# Altium PCB PCB1_GHEPNOI.PcbDoc
Units mil, origin at the board's own origin, x right, y up, seen from the top; angles counter-clockwise.
Board outline 3800.03 x 3840.03 mil, 2 copper layers (Top Layer, Bottom Layer); 62 components, 72 nets, 278 pads, 26 vias.
Unrouted connection lines stored in the file: 3.
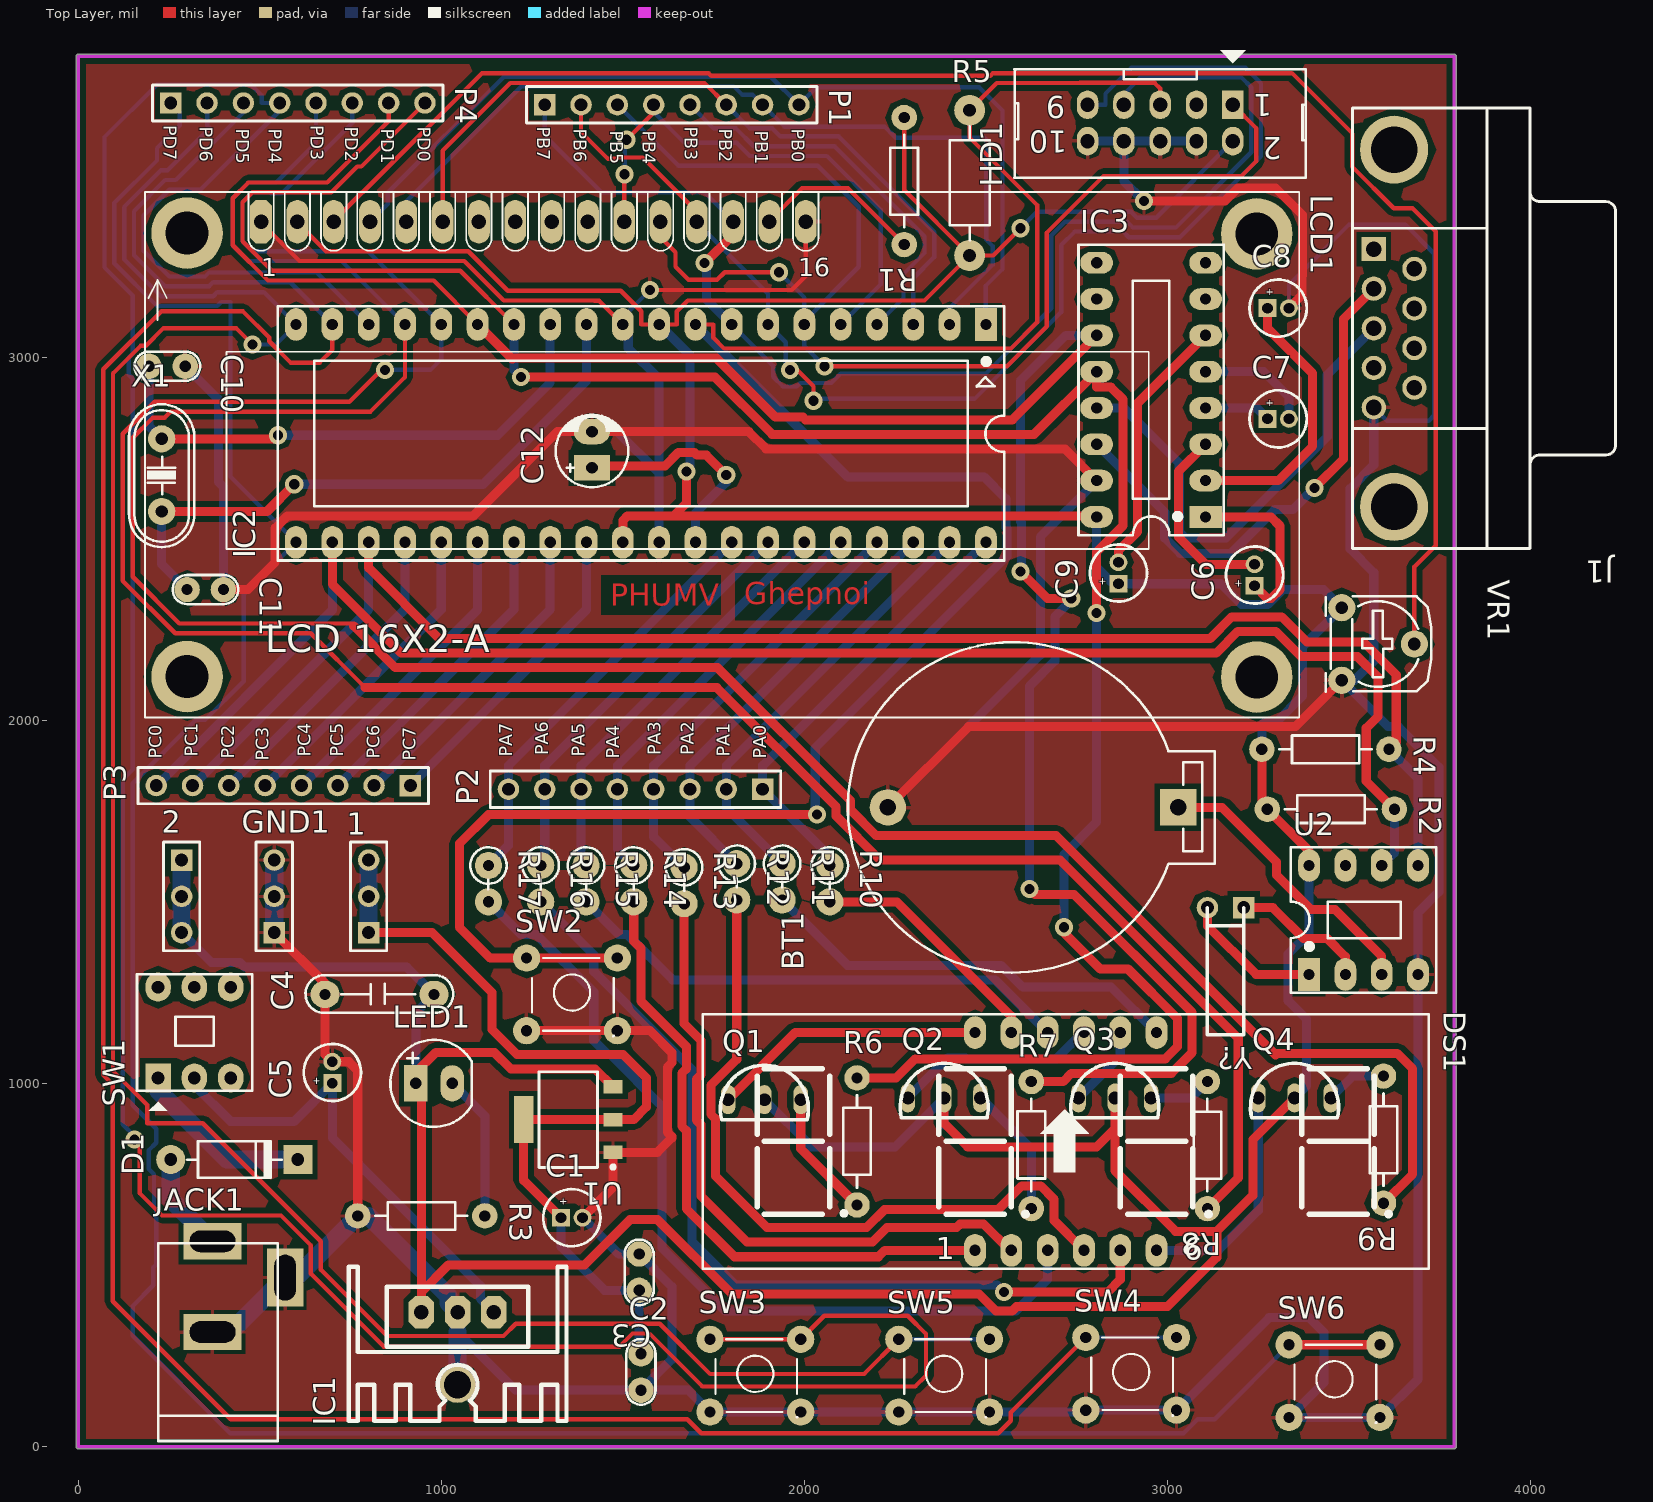
[diagram p0: Top Layer view]
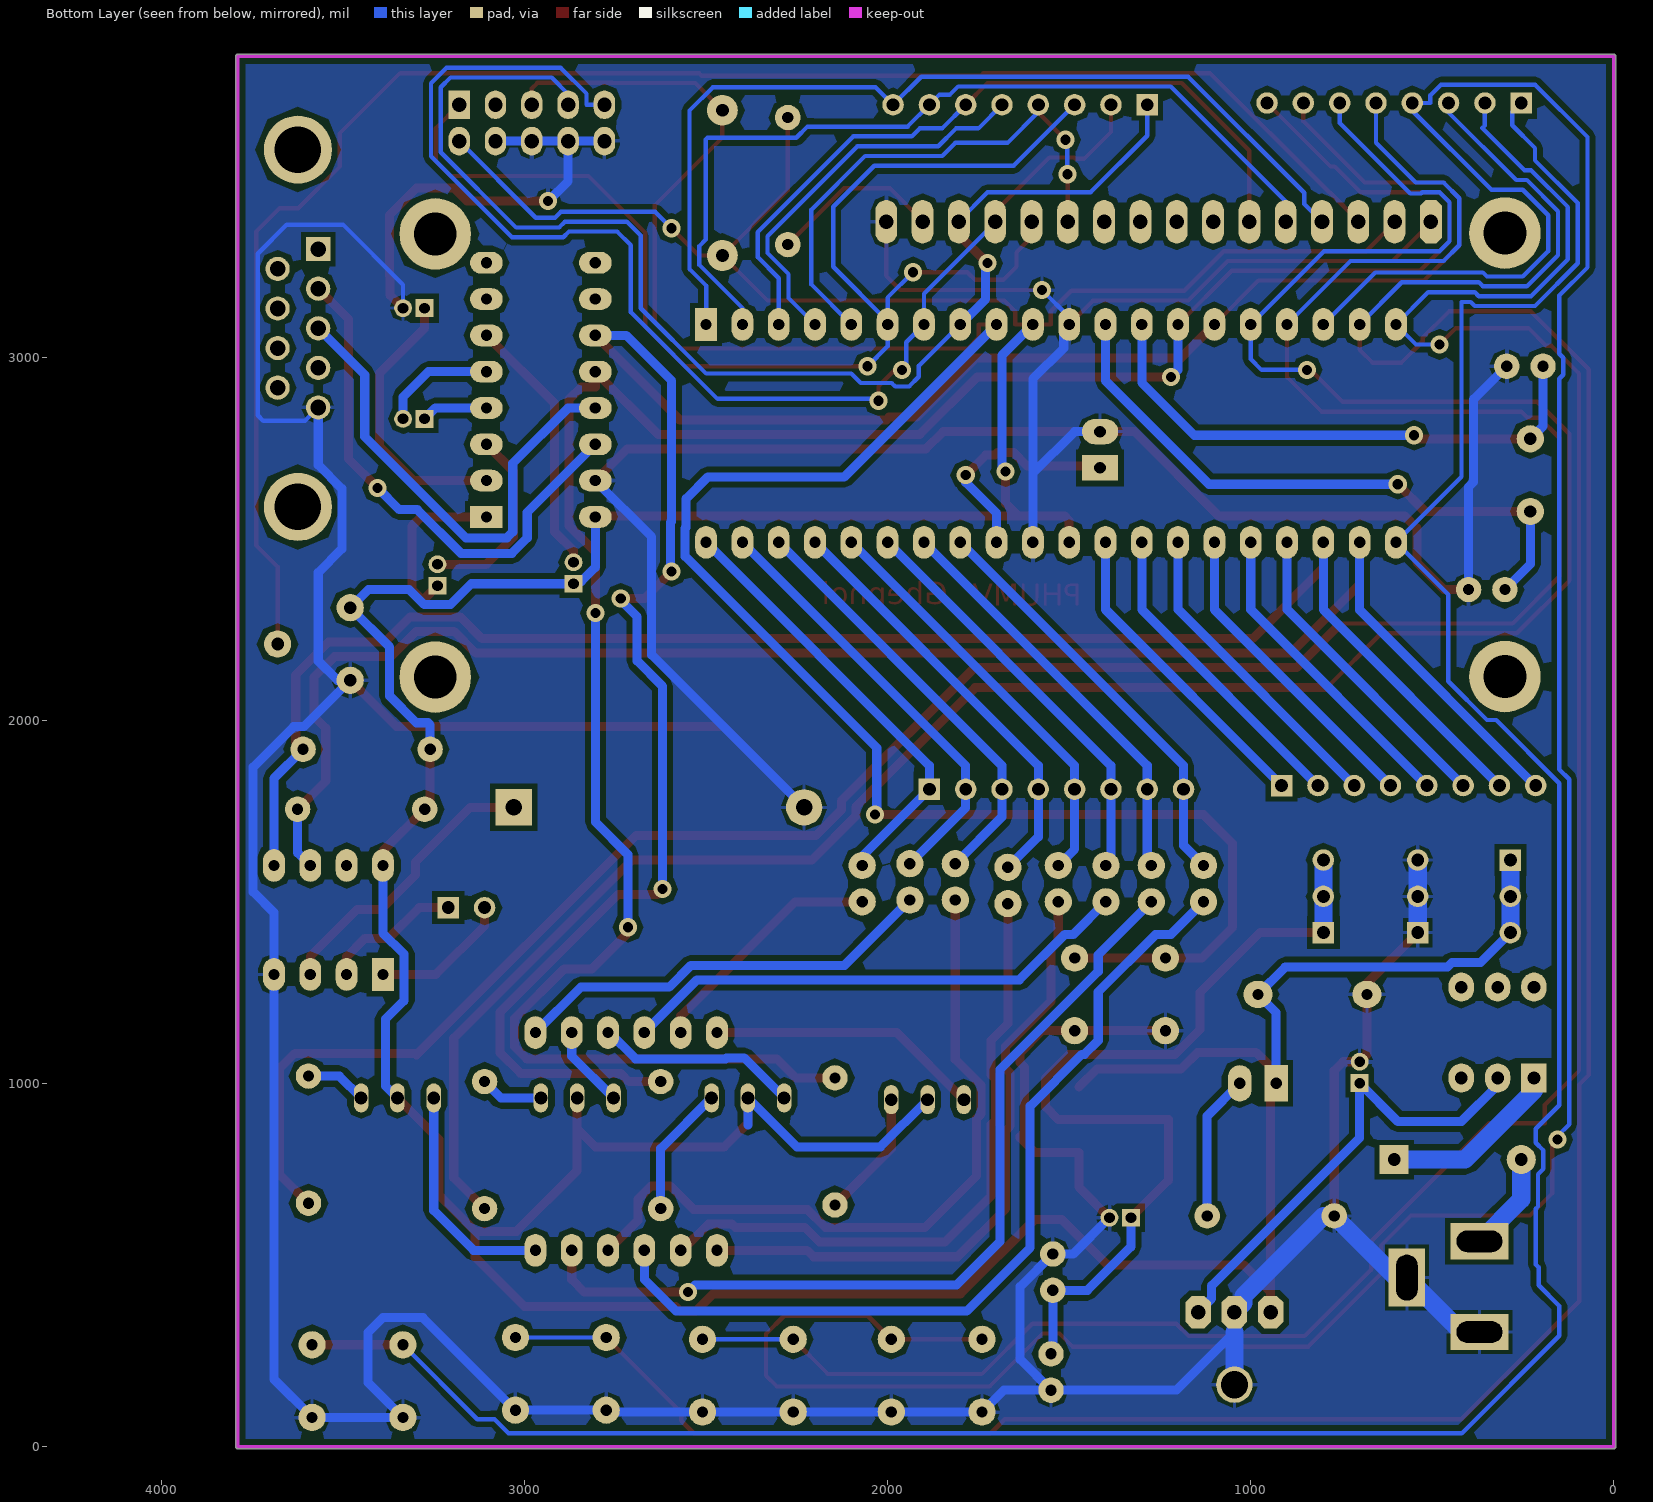
[diagram p1: Bottom Layer view, seen from below]

## Layer stack, top to bottom
Top Solder: solder mask 0.4, Solder Resist, Dk 3.5
Top Layer: signal copper 1.4
Dielectric 1: dielectric 12.6, FR-4, Dk 4.8
Bottom Layer: signal copper 1.4
Bottom Solder: solder mask 0.4, Solder Resist, Dk 3.5

## Board outline
-5.02,0 ccw(c0,0) 0,-5.02 3790,-5.02 ccw(c3790,0) 3795.02,0 3795.02,3830 ccw(c3790,3830) 3790,3835.02 0,3835.02 ccw(c0,3830) -5.02,3830

## Design rules (kind name [scope] priority, off if disabled: settings)
Clearance [All] p1: gap=15
PlaneConnect [All] p1: planeconnectstyle=Relief reliefexpansion=20 reliefentries=4 reliefconductorwidth=20 reliefairgap=10
PolygonConnect [All] p1: connectstyle=Relief reliefconductorwidth=10 reliefentries=4 polygonreliefangle="90 Angle" airgapwidth=10
RoomDefinition Sheet1 [InComponentClass('Sheet1')] p1: confinementstyle=ConfineIn formatcopy=TRUE lockcomponents=FALSE outline -1145,-1030 855,-1030 855,-30 -1145,-30
RoutingVias [All] p1: holewidth=28 width=50 viastyle="Through Hole" minholewidth=28 minwidth=50 maxholewidth=28 maxwidth=50
SolderMaskExpansion [All] p1: expansion=4
Width [All] p1: maxlimit=50 minlimit=12 preferedwidth=25
29 further rules are at their usual default settings.

## Components (designator, comment, footprint, x,y, rotation, side; value= is the part's Value field where it differs from the comment)
1 "Header 3H" HDR1X3 800,1416.07 r90 top
2 "Header 3H" HDR1X3 285,1616.07 r270 top
BT1 "PIN 3V" PIN3V 3030,1761.07 r180 top
C1 "10uF" "CAP RADIAL 3.5x7.7" 1359.53,631.07 r0 top
C2 "105" "CAP 10x DIP" 1550,156.07 r90 top
C3 "104" "CAP 10x DIP" 1545,531.07 r270 top
C4 "0.1F" CN3 980,1246.07 r180 top
C5 "" "CAP RADIAL 3.5x7.7" 700,1031.07 r90 top
C6 "" "CAP RADIAL 3.5x7.7" 3240,2401.07 r90 top
C7 "" "CAP RADIAL 3.5x7.7" 3305,2831.07 r0 top
C8 "" "CAP RADIAL 3.5x7.7" 3305,3136.07 r0 top
C9 "" "CAP RADIAL 3.5x7.7" 2865,2406.54 r90 top
C10 "20pF" CN1 195,2976.07 r0 top
C11 "20pF" CN1 300,2361.07 r0 top
C12 "1uF" CP1/2 1415,2696.07 r90 top
D1 "1N4007" D1A 255,791.07 r180 top
DS1 "7SEGQ" 7SEGQ 2470,541.07 r0 top
GND1 "Header 3H" HDR1X3 540,1416.07 r90 top
HD1 "Header 5x2" Hed2X5 3180,3696.07 r180 top
IC1 "LM7805" QTO-220H3 1145,371.07 r180 top
IC2 "ATMEL 16L" DIP40/W0.6 2500,3091.07 r180 top
IC3 "MAX232" DIP16/W0.3 3105,2561.07 r90 top
J1 "COM 9 FEMALE" "COM9 FEMALE" 3675.09,3110.53 r180 top
JACK1 "JACK DC" "JACK DC" 470,441.07 r90 top
LCD1 "LCD 16x2" "LCD 16x2-A" 503.74,3374.02 r0 top
LED1 "LED" LED-5-Green 930,1001.07 r0 top
P1 "Header 8" HDR1X8 1285,3696.07 r0 top
P2 "Header 8" HDR1X8 1885,1811.07 r180 top
P3 "Header 8" HDR1X8 915,1821.07 r180 top
P4 "Header 8" HDR1X8 255,3701.07 r0 top
Q1 "NPN-TO92" TO-92 1890,956.07 r0 top
Q2 "NPN-TO92" TO-92 2385,961.07 r0 top
Q3 "NPN-TO92" TO-92 2855,961.07 r0 top
Q4 "NPN-TO92" TO-92 3350,961.07 r0 top
R1 "220" R1/4W 2275,3661.07 r270 top
R2 "2.7K" R1/4W 3275,1756.07 r0 top
R3 "220" R1/4W 770,636.07 r0 top
R4 "2.7K" R1/4W 3260,1921.07 r0 top
R5 "100k" RESISTOR 2455,3281.07 r90 top
R6 "10K" R1/4W 2145,666.07 r90 top
R7 "10K" R1/4W 2625,656.07 r90 top
R8 "10K" R1/4W 3110,1006.07 r270 top
R9 "10K" R1/4W 3595,1021.07 r270 top
R10 "Res1" R1/4W1 2070,1601.07 r270 top
R11 "Res1" R1/4W1 1938.75,1606.07 r270 top
R12 "Res1" R1/4W1 1813.75,1606.07 r270 top
R13 "Res1" R1/4W1 1668.75,1596.07 r270 top
R14 "Res1" R1/4W1 1530,1601.07 r270 top
R15 "Res1" R1/4W1 1398.75,1601.07 r270 top
R16 "Res1" R1/4W1 1273.75,1601.07 r270 top
R17 "Res1" R1/4W1 1130,1601.07 r270 top
SW1 "SW6S" SW6 220,1016.07 r90 top
SW2 "SW" SW4 1235,1346.07 r0 top
SW3 "SW" SW4 1740,296.07 r0 top
SW4 "SW" SW4 2775,301.07 r0 top
SW5 "SW" SW4 2260,296.07 r0 top
SW6 "SW" SW4 3335,281.07 r0 top
U1 "AMS1117-3.3V" "SOT223 - 3 LEAD" 1350,901.07 r180 top
U2 "DS1307" DIP8/W0.3 3390,1301.07 r0 top
VR1 "10K" VR 3480,2311.07 r270 top
X1 "16Mhz" XT2 230,2676.07 r90 top
Y? "32.768KHz" XTAL32K 3210,1485 r180 top

## Footprints (in the part's own frame and the unit in brackets; to place one, negate y for a bottom-side part, rotate by r counter-clockwise, add the part's x,y. Pads: shape width x height; smd on the part's side, far side on the other; paste and mask are expansions set on the pad)
7SEGQ [mil] "DIP 12 Leads; Body 48 x 20 mm; Pitch 0.5 mm"
  oval 60x90 hole 31: 1(0,0) 2(100,0) 3(200,0) 4(300,0) 5(400,0) 6(500,0) 7(500,600) 8(400,600) 9(300,600) 10(200,600) 11(100,600) 12(0,600)
  silkscreen extent -750,-50 1250,650, body extent -720,-80 1260,668, height 565
"CAP 10x DIP" [mil]
  round 70 hole 31: 1(0,0) 2(100,0)
  silkscreen extent -40,-40 141,40, body extent -65,-32 165,35, height 265
"CAP RADIAL 3.5x7.7" [mm] "Capacitor  Electrolitico Radial 3.5mm diametro  x 7.7mm de altura (1.5mm entre pines)"
  rect 1.25x1.25 hole 0.75: 1(-0.75,0)
  round 1.25 hole 0.75: 2(0.75,0)
  silkscreen extent -2,-2 2,2, body extent -1.78,-1.78 1.77,1.77, height 8.53
CN1 [mil]
  round 70 hole 31: 1(0,0) 2(100,0)
  silkscreen extent -40,-40 141,40, body extent -60,-30 170,37, height 265
CN3 [mil] "Cap np W 0.3"
  oval 80x75 hole 31: 1(0,0) 2(300,0)
  silkscreen extent -53,-53 354,51, body extent 0,-39 315,55, height 419
"COM9 FEMALE" [mm]
  rect 1.69x1.69 hole 1.09: 1(2.715,-4.78)
  round 1.69 hole 1.09: 2(2.715,-2.01) 3(2.715,0.76) 4(2.715,3.53) 5(2.715,6.3) 6(-0.125,-3.395) 7(-0.125,-0.625) 8(-0.125,2.145) 9(-0.125,4.915)
  round 4.76 hole 3.26: BO1(1.295,-11.735) BO2(1.295,13.255)
  silkscreen extent -14.2,-14.64 4.2,16.16, body extent -13.93,-14.64 4.37,16.17, height 12.77
CP1/2 [mil] "Tu hoa < 22uF/16>50V"
  rect 70x100 hole 32: 1(0,0)
  oval 70x100 hole 32: 2(100,0)
  silkscreen extent -53,-100 146,100, body extent -49,-99 149,99, height 287
D1A [mil] "Diode 1A, W 100mil, L 350mil"
  round 80 hole 35: 1(0,0)
  rect 80x80 hole 35: 2(-350,0)
  silkscreen extent -305,-50 -45,50, body extent -386,-33 34,36, height 84
DIP8/W0.3 [mil] "8 PIN, W 300mil, Pin to pin 100mil"
  rect 60x90 hole 31: 1(0,0)
  oval 60x90 hole 31: 2(100,0) 3(200,0) 4(300,0) 5(300,300) 6(200,300) 7(100,300) 8(0,300)
  silkscreen extent -50,-50 350,350, body extent -50,-40 350,336, height 201
DIP16/W0.3 [mil] "16 PIN, W 300mil, Pin to pin 100mil"
  rect 60x90 hole 31: 1(0,0)
  oval 60x90 hole 31: 2(100,0) 3(200,0) 4(300,0) 5(400,0) 6(500,0) 7(600,0) 8(700,0) 9(700,300) 10(600,300) 11(500,300) 12(400,300) 13(300,300) 14(200,300) 15(100,300) 16(0,300)
  silkscreen extent -50,-50 750,350, body extent -52,-57 752,356, height 299
DIP40/W0.6 [mil] "40 PIN, W 600mil, Pin to pin 100mil"
  rect 60x90 hole 31: 1(0,0)
  oval 60x90 hole 31: 2(100,0) 3(200,0) 4(300,0) 5(400,0) 6(500,0) 7(600,0) 8(700,0) 9(800,0) 10(900,0) 11(1000,0) 12(1100,0) 13(1200,0) 14(1300,0) 15(1400,0) 16(1500,0) 17(1600,0) 18(1700,0) 19(1800,0) 20(1900,0) 21(1900,600) 22(1800,600) 23(1700,600) 24(1600,600) 25(1500,600) 26(1400,600) 27(1300,600) 28(1200,600) 29(1100,600) 30(1000,600) 31(900,600) 32(800,600) 33(700,600) 34(600,600) 35(500,600) 36(400,600) 37(300,600) 38(200,600) 39(100,600) 40(0,600)
  silkscreen extent -50,-50 1950,650, body extent -82,-10 1982,600, height 224
HDR1X3 [mm] "Connector; Header; 3 Position"
  rect 1.5x1.5 hole 0.9: 1(0,0)
  round 1.5 hole 0.9: 2(2.54,0) 3(5.08,0)
  silkscreen extent -1.27,-1.27 6.35,1.27, body extent -1.27,-1.27 6.35,1.27, height 7
HDR1X8 [mm] "Connector; Header; 8 Position"
  rect 1.5x1.5 hole 0.9: 1(0,0)
  round 1.5 hole 0.9: 2(2.54,0) 3(5.08,0) 4(7.62,0) 5(10.16,0) 6(12.7,0) 7(15.24,0) 8(17.78,0)
  silkscreen extent -1.27,-1.27 19.05,1.27, body extent -1.27,-1.27 19.05,1.27, height 7
Hed2X5 [mm] "Header 10x2,20 pin, connecter"
  rect 1.5x2 hole 1: 1(0,0)
  oval 1.5x2 hole 1: 2(0,2.54) 3(2.54,0) 4(2.54,2.54) 5(5.08,0) 6(5.08,2.54) 7(7.62,0) 8(7.62,2.54) 9(10.16,0) 10(10.16,2.54)
  silkscreen extent -5.1,-3.81 15.29,5.11, body extent -5.17,-3.33 15.33,5.97, height 8.82
"JACK DC" [mil] "Jac DC input"
  rect 100x160 hole 59.06 slot 125.98 at 90 deg: 1(125,100) 2(-125,100)
  rect 160x100 hole 59.06 slot 125.98 at 0 deg: 3(25,-100)
  silkscreen extent -425,-80 120,250, body extent -410,-105 134,269, height 434
"LCD 16x2-A" [mil] "Pantalla LCD 16 caracteres x 2 Lineas, conexion superior"
  round 196.85 hole 118.11: 0(-203.74,-1252.95) 0(-203.74,-31.5) 0(2742.13,-33.46) 0(2742.13,-1253.94)
  oct 60x120 hole 40: 1(0,0)
  oval 60x120 hole 40: 2(100,0) 3(200,0) 4(300,0) 5(400,0) 6(500,0) 7(600,0) 8(700,0) 9(800,0) 10(900,0) 11(1000,0) 12(1100,0) 13(1200,0) 14(1300,0) 15(1400,0) 16(1500,0)
  silkscreen extent -320,-1365 2859,82, body extent -315,-1357 2854,80, height 753
LED-5-Green [mil] "LED 2 PIN, 5 ly , Only colour,pin to pin 100mil"
  rect 65x100 hole 32: 1(0,0)
  oval 65x100 hole 32: 2(100,0)
  silkscreen extent -70,-120 154,120, body extent -69,-120 145,117, height 339
PIN3V [mil] "Socket PIN 3V"
  rect 100x100 hole 45: 1(0,0)
  round 100 hole 45: 2(800,0)
  silkscreen extent -100,-455 910,455, body extent -128,-447 1002,449, height 278
QTO-220H3 [mil] "TO-220 1-2-3"
  oct 70x90 hole 40: 1(0,0) 2(100,0) 3(200,0)
  round 100 hole 75: 2(100,200)
  silkscreen extent -200,-125 400,300, body extent -190,-102 392,323, height 984
R1/4W [mil] "R 1/4W, 2 Pin, 350mil"
  round 70 hole 31: 1(0,0) 2(350,0)
  silkscreen extent 48,-38 302,38, body extent -40,-47 386,47, height 111
R1/4W1 [mm] "R 1/4W, 2 Pin, 150mil"
  round 1.905 hole 0.8: 1(0,0) 2(2.54,0)
  silkscreen extent -1.28,-1.27 1.65,1.28, body extent -0.89,-0.92 2.82,0.92, height 7.3
RESISTOR [mil] "R 1/2W, 2 pin, 300mil"
  round 85 hole 35: 1(0,0) 2(400,0)
  silkscreen extent 42,-55 356,55, body extent -12,-45 414,49, height 91
"SOT223 - 3 LEAD" [mm] "SOT223, 4-Leads, Body 6.7x6.7mm (max), Pitch 2.29mm, IPC Medium Density"
  rect 1.35x0.95 smd: 1(-3.125,2.29) 2(-3.125,0) 3(-3.125,-2.29)
  rect 1.35x3.3 smd: 4(3.125,0)
  silkscreen extent -3.25,-3.35 2.05,3.44, body extent -3.54,-3.25 3.54,3.25, height 1.65
SW4 [mil] "SW button 4pin, 250 x250 mil"
  round 75 hole 31: 1(0,0) 2(250,-200) 3(250,0) 4(0,-200)
  silkscreen extent 15,-215 240,0, body extent -36,-220 276,24, height 276
SW6 [mil] "SW DTDP - 6Pin 260x300x300 mil"
  rect 80x70 hole 35: 1(0,0)
  oval 80x70 hole 35: 2(0,-100) 3(0,-200) 4(250,-200) 5(250,-100) 6(250,0)
  silkscreen extent -90,-260 285,58, body extent -33,-259 281,55, height 532
TO-92 [mil] "TO, Flat Index; 3 In-Line, Axial Leads; Body Dia. 4.8mm"
  oval 40x80 hole 35.43: 1(-100,0) 2(0,0) 3(100,0)
  silkscreen extent -121,-55 121,95, body extent -110,-70 110,85, height 402
VR [mil] "Resistor Variable"
  round 75 hole 35: 1(0,0) 2(100,200) 3(200,0)
  silkscreen extent -31,-44 231,246, body extent -87,-30 307,372, height 165
XT2 [mil] "Footpin for Crystal 2 pin"
  round 75 hole 34: 1(-100,0) 2(100,0)
  silkscreen extent -198,-90 195,90, body extent -233,-93 213,90, height 138
XTAL32K [mm] "Connector; Header; 2 Position"
  rect 1.5x1.5 hole 0.9: 1(0,0)
  round 1.5 hole 0.9: 2(2.54,0)
  silkscreen extent 0,0 2.54,8.89

## Part data
BT1: "Battery 3VDC"
C1: library part CAPACITOR
C2 C3: library part "CAP CERAMIC"
C4: library part CN3, "Cap np W0.3"
C5 C6 C7 C8 C9: library part "Cap Pol3", "Polarized Capacitor (Surface Mount)"
C10 C11: library part CN1, "Cap np  1pF - 472pF"
C12: library part CP1, "Cap P  0,1uF < 22uF , 16 - 50V"
D1: library part D1A, "Diode 1A"
DS1: library part LED7Q, "Four 7 Seg Dipslay"
HD1: library part HED5x2
IC1: library part LM78xx, "On ap +, from + 5 to + 24VDC"
IC2: library part Atmega16L, "8-Bit AVR Microcontroller with 16K Bytes of In-System Programmable Flash Memory"
IC3: "Dual EIA-232 Driver/Receiver"
LED1: "LED Single colour Green and Red"
R1 R2 R3 R4 R6 R7 R8 R9: library part R1/4W, "Resistor 1/4W"
R5: library part RESISTOR
R10 R11 R12 R13 R14 R15 R16 R17: library part Res1_2, "Resistor"
SW1: "SW-DTDP - 6 Pin"
SW2 SW3 SW4 SW5 SW6: library part SW4, "Switch button 4 pin"
U1: library part AMS1117
VR1: library part "VAR RES"
X1: library part XT2, "Crystal For all Crystal 2pin."
Y?: library part XTAL/32KHz, "Crystal Oscillator"

## Via types
v1: diameter 50, hole 28, Top Layer to Bottom Layer, 26 vias

## Nets (pads, with @x,y where several pads share a name; then routed paths per layer and width w, separated by ;. In a path a pad name is that pad's centre, name@x,y a point inside that pad or via, vN(x,y) a via of type N, cw(c..) or ccw(c..) an arc to the next point about the centre after c; other vN are vias at no path point)
3.3V: 1.1 1.2 1.3 C1.1 C2.2 C3.2 U1.2 U1.4 | length 2457.4
  Top Layer w25: 1.1 975,1416.07 1140,1251.07 1140,1149.15 1208.08,1081.07 1500,1081.07 1565,1016.07 1565,936.07 1530,901.07 U1.2 U1.4 1226.97,734.1 C1.1
  Bottom Layer w25: C1.1 1330,551.07 1450,431.07 C3.2 1545,261.07 C2.2
  Bottom Layer w50: 1.1 1.2 1.3
AREF: C12.1 IC2.32 | length 633.7
  Top Layer w25: C12.1 1420,2701.07 1615.75,2701.07 1653.25,2738.57 1696.75,2738.57 1704.25,2731.07 1730,2731.07 v1(1785,2676.07)
  Bottom Layer w25: IC2.32 1700,2571.07 1785,2656.07 v1(1785,2676.07)
GND: BT1.2 C1.2 C2.1 C3.1 C4.2 C5.2 C9.1 C10.2 C11.2 C12.2 GND1.1 GND1.2 GND1.3 HD1.4 HD1.6 HD1.8 HD1.10 IC1.2 IC2.11 IC2.31 IC3.15 J1.5 JACK1.2 JACK1.3 LCD1.1 LCD1.16 R3.1 SW2.2 SW2.4 SW3.2 SW3.4 SW4.2 SW4.4 SW5.2 SW5.4 SW6.2 SW6.4 U1.1 U2.4 VR1.3 | length 21190
  Top Layer w12: LCD1.1 503.74,3371.9 609.62,3266.02 1063.23,3266.02 1172.18,3157.07 1421.12,3157.07 1422.12,3156.07 1435,3156.07 IC2.11 ; v1(1575,3186.07) 1965,3186.07 2003.74,3224.81 LCD1.16
  Top Layer w25: C11.2 467.17,2361.07 542.5,2436.39 542.5,2529.89 576.18,2563.57 1087.5,2563.57 1320,2796.07 C12.2 1847.36,2796.07 1894.86,2748.57 2717.5,2748.57 IC3.15 ; GND1.1 680,1276.07 C4.2 680,1080.6 C5.2 745.47,1060.6 770,1036.07 R3.1 ; SW2.4 SW2.2 1575,1146.07 1635,1086.07 1635,1057.95 1622.5,1045.45 1622.5,866.69 1635,854.19 1635,851.07 1594.84,810.91 U1.1 1473.03,715.05 C1.2 ; BT1.2 2452.5,1983.57 3352.5,1983.57 VR1.3 ; v1(2935,3431.07) 3158.29,3431.07 3193.71,3466.48 3298.03,3466.48 3371.79,3392.72 3371.79,3226.34 3370,3224.55 3370,3171.54 3334.53,3136.07
  Bottom Layer w12: IC2.11 1500,3111.07 v1(1575,3186.07) ; 3334.53,3136.07 3334.53,3200.6 3500,3366.07 3655,3366.07 3735,3286.07 3735,2841.07 3720,2826.07 3604.61,2826.07 J1.5
  Bottom Layer w25: C10.2 385.93,2885.14 385.93,2657.77 400,2643.69 C11.2 ; IC1.2@1045,371.07 1045,316.07 1205,156.07 C2.1 ; C1.2 1489.06,531.07 C3.1 1635,441.07 1635,241.07 C2.1 ; C12.2 1485,2796.07 1600,2681.07 ; IC2.11 1515,3076.07 1515,3026.07 1600,2941.07 1600,2681.07 ; IC2.31 1600,2681.07 ; BT1.2 2650,2181.07 2650,2506.07 IC3.15 ; HD1.10 HD1.8 ; v1(2935,3431.07) 2880,3486.07 HD1.8 ; HD1.4 HD1.6 HD1.8 ; J1.5 3568.19,2704.17 3502.89,2638.87 3502.89,2473.17 3568.19,2407.87 3568.19,2164.26 3515,2111.07 VR1.3 3607.5,1983.57 3635.89,1983.57 3747.5,1871.96 3747.5,1528.57 3690,1471.07 U2.4 3690,186.07 SW6.2 SW6.4 3431.5,177.57 3431.5,314.57 3390,356.07 3280,356.07 SW4.2 SW4.4 2770,96.07 SW5.2 SW5.4 SW3.2 SW3.4 1680,156.07 C2.1
  Bottom Layer w50: JACK1.2 420,316.07 JACK1.3 600,466.07 R3.1 799.07,636.07 1020,415.14 1020,396.07 IC1.2@1045,371.07 ; GND1.1 GND1.2 GND1.3 ; IC1.2@1045,171.07 1045,316.07
MISO: HD1.9 IC2.7 LCD1.13 P1.2 | length 3554
  Top Layer w12: P1.2 1385,3621.07 1459,3547.07 1482.02,3547.07 1485.95,3551 1555.07,3551 1703.74,3402.33 LCD1.13 ; v1(1960,2966.07) 1970,2976.07 2025,2921.07 v1(2025,2881.07)
  Bottom Layer w12: LCD1.13 1703.74,3371.9 1900,3175.64 IC2.7 1949,3042.07 1949,2977.07 v1(1960,2966.07) ; v1(2025,2881.07) 2025,2886.07 2468.18,2886.07 2707,3124.89 2707,3309.07 2745,3347.07 2877.58,3347.07 2893.58,3331.07 3034.48,3331.07 3257.53,3554.11 3257.53,3755.32 3214.78,3798.07 2900.7,3798.07 2829.47,3726.84 2829.47,3696.07 HD1.9
MOSI: HD1.1 IC2.6 LCD1.12 P1.3 | length 3676.2
  Top Layer w12: LCD1.12 1603.74,3331.26 1645,3290 1645,3250 1681,3214 1759.44,3214 1780.44,3235 v1(1930,3235) ; v1(2055,2976.07) 2558.18,2976.07 2668,3085.89 2668,3344.07 2823.91,3499.98 3203.91,3499.98 3245,3541.07 3245,3631.07 HD1.1
  Bottom Layer w12: P1.3 1653,3528.07 2036.93,3528.07 2150,3415 2150,3250 IC2.6@2000,3100 ; v1(1930,3235) 2000,3165 IC2.6@2000,3100 ; v1(2055,2976.07) 2000,3031.07 IC2.6 IC2.6@2000,3100
NetBT1_1: BT1.1 U2.3 | length 801
  Top Layer w25: BT1.1 3150,1761.07 3300,1611.07 3300,1575 3395,1480 3461.07,1480 3590,1351.07 U2.3
NetC5_1: C5.1 IC1.1 SW1.2 | length 1299.9
  Bottom Layer w25: SW1.2 320,996.07 420,896.07 594.53,896.07 C5.1 700,851.07 1107.5,443.57 1107.5,408.57 IC1.1
NetC6_1: C6.1 IC3.1 | length 485.4
  Top Layer w25: IC3.1 3285,2561.07 3310,2536.07 3310,2361.07 3285,2336.07 3275.47,2336.07 C6.1
NetC6_2: C6.2 IC3.3 | length 527.3
  Top Layer w25: IC3.3 3030,2686.07 3030,2506.07 3105.47,2430.6 C6.2
NetC7_1: C7.1 IC3.4 | length 182.9
  Bottom Layer w25: IC3.4 3245.47,2861.07 C7.1
NetC7_2: C7.2 IC3.5 | length 318.8
  Bottom Layer w25: IC3.5 3265,2961.07 3334.53,2891.54 C7.2
NetC8_1: C8.1 IC3.2 | length 765.9
  Top Layer w25: IC3.2 3305,2661.07 3400,2756.07 3400,2956.07 3275.47,3080.6 C8.1
NetC9_2: C9.2 IC3.6 | length 724.4
  Top Layer w25: C9.2 2865,2468.18 2917.5,2520.68 2917.5,2873.57 IC3.6
NetD1_1: D1.1 JACK1.1 | length 272.6
  Bottom Layer w50: D1.1 255,681.07 JACK1.1
NetD1_2: D1.2 SW1.1 | length 498.7
  Bottom Layer w50: SW1.1 220,981.07 410,791.07 D1.2
NetDS1_1: DS1.1 R14.2 | length 1772.5
  Top Layer w25: R14.2 1530,1392.99 1550,1372.99 1550,1227.64 1675,1102.64 1675,1041.38 1662.5,1028.88 1662.5,883.26 1675,870.76 1675,656.07 1807.5,523.57 2204.03,523.57 2221.53,541.07 DS1.1
NetDS1_2: DS1.2 R13.2 | length 1793.1
  Top Layer w25: R13.2 1668.75,1165.46 1715,1119.21 1715,1024.81 1702.5,1012.31 1702.5,899.83 1715,887.33 1715,691.07 1842.5,563.57 2187.46,563.57 2227.46,603.57 2418.68,603.57 2428.68,613.57 2493.82,613.57 2566.32,541.07 DS1.2
NetDS1_3: DS1.3 R17.2 | length 2430.1
  Bottom Layer w25: R17.2 1220,1411.07 1261.92,1411.07 1420,1252.99 1420,1119.15 1458.08,1081.07 1465,1081.07 1607.5,938.57 1607.5,548.57 1782.5,373.57 2582.5,373.57 2670,461.07 DS1.3
NetDS1_4: DS1.4 R12.2 | length 2024.1
  Top Layer w25: R12.2 1813.75,1066.99 1742.5,995.74 1742.5,916.39 1755,903.89 1755,746.07 1897.5,603.57 2170.89,603.57 2220.89,653.57 2534.11,653.57 2599.11,718.57 2650.89,718.57 2687.5,681.96 2687.5,623.57 DS1.4
NetDS1_5: DS1.5 R16.2 | length 2439.9
  Top Layer w25: v1(2550,426.07) 2835,426.07 2870,461.07 DS1.5
  Bottom Layer w25: R16.2 1420,1354.82 1420,1309.56 1690,1039.56 1690,566.07 1810,446.07 2530,446.07 v1(2550,426.07)
NetDS1_6: DS1.6 Q4.1 | length 635.6
  Bottom Layer w25: DS1.6 3140,541.07 3250,651.07 Q4.1
NetDS1_7: DS1.7 R11.2 | length 1182.4
  Bottom Layer w25: R11.2 2118.75,1326.07 2541.57,1326.07 2601.57,1266.07 2845,1266.07 DS1.7
NetDS1_8: DS1.8 Q3.1 | length 227.6
  Bottom Layer w25: Q3.1 2870,1076.07 DS1.8
NetDS1_9: DS1.9 Q2.1 | length 561.6
  Bottom Layer w25: Q2.1 2395,1071.07 2443.68,1071.07 2446.18,1068.57 2693.82,1068.57 2766.32,1141.07 DS1.9
NetDS1_10: DS1.10 R15.2 | length 1420.4
  Bottom Layer w25: R15.2 1488.75,1411.07 1511.92,1411.07 1636.92,1286.07 2525,1286.07 DS1.10
NetDS1_11: DS1.11 R10.2 | length 675.5
  Top Layer w25: R10.2 2255,1501.07 2570,1186.07 DS1.11
NetDS1_12: DS1.12 Q1.1 | length 756.6
  Top Layer w25: Q1.1 1975,1141.07 DS1.12
NetIC3_13: IC3.13 J1.3 | length 1360.7
  Bottom Layer w25: IC3.13 2880.1,2861.07 3032.5,2708.67 3032.5,2519.68 3048.61,2503.57 3161.39,2503.57 3440,2782.18 3440,2952.41 J1.3
NetIC3_14: IC3.14 J1.2 | length 1456.7
  Top Layer w25: v1(3405,2641.07) 3485,2721.07 3485,3106.47 J1.2
  Bottom Layer w25: IC3.14 2992.5,2573.57 2992.5,2503.11 3035,2460.61 3175,2460.61 3295.46,2581.07 3345,2581.07 v1(3405,2641.07)
NetLCD1_15: LCD1.15 R1.2 | length 474.8
  Top Layer w12: LCD1.15 1903.74,3376.15 1993.66,3466.07 2120,3466.07 R1.2
NetLED1_2: LED1.2 R3.2 | length 402.3
  Bottom Layer w25: LED1.2 1120,911.07 R3.2
NetQ1_3: Q1.3 R6.1 | length 354.2
  Top Layer w25: Q1.3 1990,821.07 R6.1
NetQ2_3: Q2.3 R7.1 | length 363
  Bottom Layer w25: Q2.3 2625,821.07 R7.1
NetQ3_3: Q3.3 R8.1 | length 173.6
  Bottom Layer w25: Q3.3 3065,961.07 R8.1
NetQ4_3: Q4.3 R9.1 | length 169.9
  Bottom Layer w25: Q4.3 3510,1021.07 R9.1
NetU2_1: U2.1 Y?.2 | length 385.5
  Top Layer w25: Y?.2 3110,1435 3243.93,1301.07 U2.1
NetU2_2: U2.2 Y?.1 | length 384.8
  Top Layer w25: Y?.1 3290,1485 3375,1400 3440,1400 3490,1350 U2.2
PA0: IC2.40 P2.1 R10.1 | length 1221.4
  Bottom Layer w25: R10.1 2070,1626.07 P2.1 1885,1876.07 IC2.40
PA1: IC2.39 P2.2 R11.1 | length 1203.4
  Bottom Layer w25: R11.1 1785,1759.82 P2.2 1785,1876.07 IC2.39
PA2: IC2.38 P2.3 R12.1 | length 1193.1
  Bottom Layer w25: R12.1 1685,1734.82 P2.3 1685,1876.07 IC2.38
PA3: IC2.37 P2.4 R13.1 | length 1184.4
  Bottom Layer w25: R13.1 1585,1679.82 P2.4 1585,1876.07 IC2.37
PA4: IC2.36 P2.5 R14.1 | length 1163.4
  Bottom Layer w25: R14.1 1485,1646.07 P2.5 1485,1876.07 IC2.36
PA5: IC2.35 P2.6 R15.1 | length 1150.4
  Bottom Layer w25: R15.1 1385,1614.82 P2.6 1385,1876.07 IC2.35
PA6: IC2.34 P2.7 R16.1 | length 1149.4
  Bottom Layer w25: R16.1 1285,1612.32 P2.7 1285,1876.07 IC2.34
PA7: IC2.33 P2.8 R17.1 | length 1167.5
  Bottom Layer w25: R17.1 1185,1656.07 P2.8 1185,1876.07 IC2.33
PB0: IC2.1 LCD1.4 P1.8 | length 2612.2
  Bottom Layer w12: LCD1.4 852.74,3423.02 852.74,3453.81 1172.53,3773.6 1907.47,3773.6 P1.8 2033.5,3744.57 2481.3,3744.57 2545.5,3680.37 2545.5,3243.58 2500,3198.08 IC2.1
PB1: IC2.2 LCD1.5 P1.7 | length 2410.3
  Bottom Layer w12: LCD1.5 903.74,3429.81 1220.53,3746.6 1805.93,3746.6 1828.46,3724.07 1857,3724.07 P1.7 1945,3636.07 2220.8,3636.07 2251.8,3605.07 2496,3605.07 2500.71,3600.36 2500.71,3325.16 2518.5,3307.37 2518.5,3254.77 2400,3136.27 IC2.2
PB2: IC2.3 LCD1.6 P1.6 | length 2075.7
  Top Layer w12: LCD1.6 1003.74,3569.81 1190,3756.07 1725,3756.07 P1.6
  Bottom Layer w12: P1.6 1850,3631.07 1911.82,3631.07 1933.82,3609.07 2094.38,3609.07 2358,3345.45 2358,3276.69 2300,3218.69 IC2.3
PB3: IC2.4 P1.5 | length 1093.3
  Bottom Layer w12: P1.5 1750,3631.07 1811.82,3631.07 1860.82,3582.07 2083.2,3582.07 2331,3334.27 2331,3287.87 2273,3229.87 2273,3164.07 IC2.4
PB4: IC2.5 LCD1.11 P1.4 | length 1473.7
  Top Layer w12: LCD1.11 1503.74,3503.74 v1(1505,3505) ; v1(1510,3600) 1585,3675 P1.4
  Bottom Layer w12: v1(1505,3505) 1505,3595 v1(1510,3600) ; P1.4 1585,3676.07 1670,3591.07 1813.63,3591.07 1849.63,3555.07 2062,3555.07 2210,3407.07 2210,3201.07 IC2.5
PC2: IC2.24 P3.6 | length 870.9
  Bottom Layer w25: P3.6 900,2306.07 IC2.24
PC3: IC2.25 P3.5 | length 870.9
  Bottom Layer w25: P3.5 1000,2306.07 IC2.25
PC4: IC2.26 P3.4 | length 870.9
  Bottom Layer w25: P3.4 1100,2306.07 IC2.26
PC5: IC2.27 P3.3 | length 870.9
  Bottom Layer w25: P3.3 1200,2306.07 IC2.27
PC6: IC2.28 P3.2 | length 870.9
  Bottom Layer w25: P3.2 1300,2306.07 IC2.28
PC7: IC2.29 P3.1 | length 870.9
  Bottom Layer w25: P3.1 1400,2306.07 IC2.29
PD2: IC2.16 P4.6 R8.2 | length 6779.9
  Top Layer w12: 790,2091.07 640.57,2240.49 267.39,2240.49 123,2384.89 123,2789.98 211.08,2878.07 747,2878.07 840,2971.07 v1(845,2966.07)
  Top Layer w25: 790,2091.07 1759.25,2091.07 2087.5,1762.82 2087.5,1737.4 2208.83,1616.07 2704.45,1616.07 3195,1125.52 3195,741.07 R8.2
  Bottom Layer w12: P4.6 755,3646.07 560.65,3451.72 530.74,3451.72 527.44,3455.02 480.04,3455.02 452.74,3427.72 452.74,3320.32 480.04,3293.02 798.05,3293.02 IC2.16 1000,2996.07 970,2966.07 v1(845,2966.07)
PD3: IC2.17 P4.5 R9.2 | length 6950.8
  Top Layer w12: 758.43,2261.07 752.01,2267.49 278.57,2267.49 150,2396.07 150,2778.8 205.77,2834.57 238.5,2834.57 255,2851.07 805,2851.07 900,2946.07 IC2.17
  Top Layer w25: 758.43,2261.07 873.43,2146.07 1760.81,2146.07 2127.5,1779.38 2127.5,1753.97 2197.9,1683.57 2693.52,1683.57 3297.5,1079.59 3301.48,1083.57 3632.5,1083.57 3675,1041.07 3675,751.07 R9.2
  Bottom Layer w12: P4.5 655,3591.8 545.23,3482.02 468.86,3482.02 425.74,3438.9 425.74,3309.14 468.86,3266.02 725.05,3266.02 IC2.17
PD4: IC2.18 P4.4 SW3.1 SW3.3 | length 8113.3
  Top Layer w12: v1(155,846.07) 170,831.07 170,698.07 231,637.07 558.7,637.07 641,554.77 641,476.89 841.82,276.07 1490.8,276.07 1526.8,312.07 1573.2,312.07 1719.2,166.07 2305,166.07 2335,196.07 2335,311.07 2285,361.07 2055,361.07 SW3.3 SW3.1
  Bottom Layer w12: v1(155,846.07) 155,856.07 123,888.07 123,1838.71 150,1865.71 150,2941.87 139,2952.87 139,2999.27 150,3010.27 150,3170.9 72.58,3248.32 72.58,3607.4 216.77,3751.6 475.93,3751.6 505.53,3722 505.53,3701.07 P4.4 555,3680 336.95,3461.95 250.53,3461.95 180.58,3391.99 180.58,3293.06 250.53,3223.1 349.47,3223.1 360.51,3234.14 656.93,3234.14 IC2.18
PD5: IC2.19 P4.3 SW4.1 SW4.3 | length 7822.1
  Top Layer w12: IC2.19 700,3021.07 665,2986.07 585,2986.07 526,3045.07 526,3055.12 454.05,3127.07 228.62,3127.07 69,2967.45 69,1024.19 95,998.19 95,401.07 420,76.07 1677.27,76.07 1715.77,37.57 2534.23,37.57 2568.5,71.84 2568.5,94.57 SW4.1
  Bottom Layer w12: P4.3 455,3675 268.95,3488.95 239.35,3488.95 153.58,3403.18 153.58,3281.88 239.35,3196.1 360.65,3196.1 371.69,3207.14 583.93,3207.14 IC2.19 ; SW4.1 SW4.3
PD6: IC2.20 P4.2 SW5.1 SW5.3 | length 6518.8
  Top Layer w12: v1(480,3036.07) 435,3081.07 235,3081.07 186,3032.07 171.8,3032.07 96,2956.27 96,1035.37 190,941.37 190,891.07 342.88,891.07 668,565.95 668,488.07 851,305.07 1171.2,305.07 1205.2,339.07 1602,339.07 1740.4,200.67 2164.6,200.67 SW5.1
  Bottom Layer w12: P4.2 355,3639.25 362.13,3632.13 245.95,3515.95 228.17,3515.95 126.58,3414.36 126.58,3270.69 228.17,3169.1 371.84,3169.1 382.88,3180.14 510.93,3180.14 IC2.20 545,3036.07 v1(480,3036.07) ; SW5.1 SW5.3
PD7: IC2.21 P4.1 SW6.1 SW6.3 | length 7741.1
  Top Layer w25: SW6.1 SW6.3
  Bottom Layer w12: P4.1 280,3676.07 280,3639.83 216.98,3576.82 216.98,3542.95 99.58,3425.55 99.58,3259.51 216.98,3142.1 383.02,3142.1 394.06,3153.14 419.43,3153.14 419.43,2671.64 IC2.21 456,2347.07 456,2108.18 349.47,2001.64 324.12,2001.64 150,1827.53 150,941.07 215,876.07 215,837.34 194,816.34 194,765.8 209,750.8 209,662.02 215,656.02 215,502.12 207,494.12 207,444.89 150,387.89 150,306.07 418.5,37.57 3044.23,37.57 3082.73,76.07 3130,76.07 SW6.1
RESET: HD1.5 IC2.9 R5.2 SW2.1 SW2.3 | length 6161.7
  Top Layer w12: IC2.9 1749,3091.07 1749,3054.94 1778.88,3025.07 2569,3025.07 2641,3097.07 2641,3420.07 2455,3606.07 R5.2 2530,3756.07 2758.7,3756.07 2759.07,3756.44 2964.63,3756.44 2980,3741.07 HD1.5
  Top Layer w25: SW2.3 SW2.1 1135,1346.07 1050,1431.07 1050,1661.07 1130,1741.07 v1(2035,1741.07)
  Bottom Layer w25: IC2.9 2120,2671.07 2495,2671.07 2555,2611.07 2555,2532.39 2557.5,2529.89 2557.5,2452.25 2030,1924.75 2030,1736.07 v1(2035,1741.07)
RXD: IC2.14 IC3.12 P4.8 R6.2 | length 6515.5
  Top Layer w12: P4.8 780,3526.07 768.43,3526.07 697.38,3455.02 480.04,3455.02 452.74,3427.72 452.74,3320.32 534.04,3239.02 1052.05,3239.02 IC2.14
  Top Layer w25: v1(1220,2946.07) 1753.93,2946.07 1911.43,2788.57 2632.5,2788.57 IC3.12 2805,2918.57 2843.82,2918.57 2877.5,2884.89 2877.5,2537.25 2805,2464.75 2805,2306.07 2800,2301.07 v1(2805,2296.07) ; R6.2 2252.82,1016.07 2305.32,1068.57 2993.82,1068.57 3027.5,1102.25 3027.5,1179.89 2891.32,1316.07 2815,1316.07 2715,1416.07 v1(2715,1431.07)
  Bottom Layer w25: IC2.14 1200,2966.07 v1(1220,2946.07) ; v1(2715,1431.07) 2715,1631.07 2805,1721.07 v1(2805,2296.07)
SCK: HD1.7 IC2.8 LCD1.14 P1.1 | length 3555.6
  Top Layer w25: v1(1725,3260) 1803.74,3338.74 LCD1.14
  Bottom Layer w12: P1.1 1285,3611.02 1440.99,3455.02 1724.87,3455.02 1803.74,3376.15 LCD1.14 ; IC2.8 1914,2977.07 1914,2947.02 1940.95,2920.07 1979.05,2920.07 1989.05,2930.07 2074.05,2930.07 2100.05,2956.07 2500,2956.07 2680,3136.07 2680,3336.07 2718,3374.07 2888.76,3374.07 2904.76,3358.07 3023.3,3358.07 3230.53,3565.3 3230.53,3744.14 3203.6,3771.07 2925,3771.07 2880,3726.07 HD1.7
  Bottom Layer w25: v1(1725,3260) 1730,3255 1730,3161.07 IC2.8
SCL: IC2.22 P3.8 R2.2 U2.6 | length 4601.1
  Top Layer w25: IC2.22 700,2376.07 890,2186.07 3133.77,2186.07 3193.71,2246.01 3298.03,2246.01 3367.97,2176.07 3523.43,2176.07 3580,2119.5 3580,2011.96 3547.5,1979.46 3547.5,1833.57 R2.2
  Bottom Layer w25: P3.8 216.27,1821.07 700,2304.8 IC2.22 ; U2.6 3625,1636.07 R2.2
SDA: IC2.23 P3.7 R4.2 U2.5 | length 4509.2
  Top Layer w25: IC2.23 800,2421.07 995,2226.07 3117.2,2226.07 3177.14,2286.01 3314.6,2286.01 3384.54,2216.07 3540,2216.07 3630,2126.07 3630,1941.07 R4.2
  Bottom Layer w25: P3.7 800,2306.07 IC2.23 ; R4.2 3690,1841.07 U2.5
TXD: IC2.15 IC3.11 P4.7 R7.2 | length 6355.7
  Top Layer w12: P4.7 855,3650.83 686.2,3482.02 468.86,3482.02 425.74,3438.9 425.74,3309.14 522.86,3212.02 979.05,3212.02 IC2.15
  Top Layer w25: IC2.15 1195,2996.07 1195.75,2996.07 1198.25,2998.57 1758,2998.57 1920.5,2836.07 1995.75,2836.07 2003.25,2828.57 2572.5,2828.57 IC3.11 ; v1(2595,2411.07) 2670,2336.07 v1(2735,2336.07) ; v1(2620,1536.07) 2635,1521.07 2742.89,1521.07 3067.5,1196.46 3067.5,1085.68 3010.39,1028.57 2735.32,1028.57 2712.82,1006.07 R7.2
  Bottom Layer w25: v1(2595,2411.07) 2597.5,2413.57 2597.5,2546.46 2595,2548.96 2595,2936.07 2720,3061.07 IC3.11 ; v1(2620,1536.07) 2620,2094.5 2690,2164.5 2690,2286.07 2735,2331.07 v1(2735,2336.07)
VCC: 2.1 2.2 2.3 C4.1 C8.2 HD1.2 IC1.3 IC2.10 IC2.30 IC3.16 LCD1.2 LED1.1 Q1.2 Q2.2 Q3.2 Q4.2 R1.1 R2.1 R4.1 R5.1 U1.3 U2.8 VR1.1 | length 15126.2
  Top Layer w12: LCD1.2 603.74,3371.9 682.62,3293.02 1074.41,3293.02 1183.37,3184.07 1494.12,3184.07 1551,3127.19 1551,3091.07 IC2.10 1649,3091.07 1649,3127.19 1678.88,3157.07 2331,3157.07 R5.1 ; R1.1 2275,3461.07 R5.1 ; v1(2595,3356.07) 2520,3281.07 R5.1
  Top Layer w25: IC1.3 945,426.07 ; U1.3 1423.19,1041.07 1191.51,1041.07 1146.51,1086.07 985,1086.07 930,1031.07 LED1.1 945,986.07 945,426.07 ; IC2.30 1500,2551.07 1512.5,2563.57 1640,2563.57 ; v1(1675,2686.07) 1675,2598.57 1640,2563.57 ; Q2.2 2385,891.07 2450,826.07 2805,826.07 2855,876.07 ; IC3.16 2802.5,2563.57 1640,2563.57 ; Q3.2 2855,876.07 ; R4.1 3260,1771.07 R2.1 3390,1641.07 U2.8 ; Q4.2 3235,846.07 3235,692.68 3135.89,593.57 ; 945,426.07 1020,501.07 1395,501.07 1520,626.07 1595,626.07 1800,421.07 2480.75,421.07 2528.25,373.57 2571.75,373.57 2584.25,386.07 3000,386.07 3135.89,521.96 3135.89,593.57 ; 2855,876.07 2855,761.07 3022.5,593.57 3135.89,593.57
  Bottom Layer w12: v1(2595,3356.07) 2640,3401.07 2899.95,3401.07 2915.95,3385.07 2969,3385.07 HD1.2
  Bottom Layer w25: 2.3 367.5,1333.57 445.89,1333.57 458.39,1321.07 905,1321.07 C4.1 930,1196.07 LED1.1 ; IC2.10 1685,3006.07 1685,2686.07 v1(1675,2686.07) ; Q1.2 2020,826.07 2250,826.07 Q2.2 2385,886.07 ; IC3.16 2805,2422.38 2843.42,2383.96 2858.05,2383.96 2865,2377.01 3146.42,2377.01 3204,2319.44 3276,2319.44 3317.63,2361.07 3430,2361.07 VR1.1 3371.79,2202.86 3371.79,2067.93 3298.03,1994.16 3265.92,1994.16 3260,1988.24 R4.1 ; Q4.2 3382.5,993.57 3382.5,1178.57 3332.5,1228.57 3332.5,1357.46 3390,1414.96 U2.8
  Bottom Layer w50: 2.3 2.2 2.1
VR: LCD1.3 VR1.2 | length 4606.6
  Top Layer w12: LCD1.3 703.74,3376.15 782.62,3455.02 783.95,3455.02 1112,3783.07 1736.18,3783.07 1743.18,3776.07 2511.82,3776.07 2519.19,3783.44 3342.63,3783.44 3509.39,3616.68 3509.39,3525.02 3623.34,3411.07 3675,3411.07 3738.79,3347.27 3738.79,2482.36 3680,2423.57 VR1.2
XTAL1: C10.1 IC2.13 X1.2 | length 1508.7
  Top Layer w25: X1.2 540,2776.07 v1(550,2786.07)
  Bottom Layer w25: C10.1 195,2811.07 X1.2 ; v1(550,2786.07) 1155,2786.07 1300,2931.07 IC2.13
XTAL2: C11.1 IC2.12 X1.1 | length 1718.1
  Top Layer w25: X1.1 520,2576.07 v1(595,2651.07)
  Bottom Layer w25: X1.1 230,2431.07 C11.1 ; v1(595,2651.07) 1115,2651.07 1400,2936.07 IC2.12
pads on no net: HD1.3 IC3.7 IC3.8 IC3.9 IC3.10 J1.1 J1.4 J1.6 J1.7 J1.8 J1.9 J1.BO1 J1.BO2 LCD1.0 LCD1.7 LCD1.8 LCD1.9 LCD1.10 SW1.3 SW1.4 SW1.5 SW1.6 U2.7

## Polygon pours and split planes (outlines as drawn)
GND on Top Layer "Top Layer-No Net" (solid, pour order 4): 0,3830 0,0 3790,0 3790,3830
GND on Bottom Layer "Bottom Layer-No Net" (solid, pour order 6): 0,3830 0,0 3790,0 3790,3830

## Keep-outs
Keep-Out Layer:
  lines w10: 0,0 3790,0 3790,3830 15,3830 0,3830 0,2875 0,0

## Other copper
Top Layer:
  text "Ghepnoi" at 1835,2321.07 h60
  text "PHUMV" at 1465,2316.07 h60

## Silkscreen, mask and mechanical layers (free items; w line width, h text height)
Top Overlay:
  text "PD7" at 235,3640 h35 r270
  text "PD3" at 640,3640 h35 r270
  text "PD6" at 335,3635 h35 r270
  text "PD2" at 735,3635 h35 r270
  text "PD0" at 935,3635 h35 r270
  text "PB7" at 1265,3635 h35 r270
  text "PB3" at 1670,3635 h35 r270
  text "PD5" at 435,3630 h35 r270
  text "PD4" at 525,3630 h35 r270
  text "PD1" at 835,3630 h35 r270
  text "PB6" at 1365,3630 h35 r270
  text "PB2" at 1765,3630 h35 r270
  text "PB0" at 1965,3630 h35 r270
  text "PB5" at 1465,3625 h35 r270
  text "PB4" at 1555,3625 h35 r270
  text "PB1" at 1865,3625 h35 r270
  text "PA6" at 1295,1905 h35 r90
  text "PA3" at 1605,1905 h35 r90
  text "PA2" at 1695,1905 h35 r90
  text "PC1" at 330,1900 h35 r90
  text "PC4" at 640,1900 h35 r90
  text "PC5" at 730,1900 h35 r90
  text "PA7" at 1195,1900 h35 r90
  text "PA5" at 1395,1900 h35 r90
  text "PA1" at 1795,1900 h35 r90
  text "PC0" at 230,1895 h35 r90
  text "PC2" at 430,1895 h35 r90
  text "PC6" at 830,1895 h35 r90
  text "PA4" at 1490,1895 h35 r90
  text "PA0" at 1895,1895 h35 r90
  text "PC3" at 525,1890 h35 r90
  text "PC7" at 930,1890 h35 r90

## Text inside footprints (layer, text, board x,y; h text height)
C1: Top Overlay "+" at 1324.53,666.07 h19.68
C5: Top Overlay "+" at 665,996.07 h19.68 r90
C6: Top Overlay "+" at 3205,2366.07 h19.68 r90
C7: Top Overlay "+" at 3270,2866.07 h19.68
C8: Top Overlay "+" at 3270,3171.07 h19.68
C9: Top Overlay "+" at 2830,2371.54 h19.68 r90
DS1: Top Overlay "1" at 2362,517.07 h60; Top Overlay "6" at 3045,515.07 h60
HD1: Top Overlay "1" at 3289.25,3725.6 h60 r180; Top Overlay "2" at 3315,3606.07 h60 r180; Top Overlay "9" at 2719,3720.07 h60 r180; Top Overlay "10" at 2724,3625.07 h60 r180
LCD1: Top Overlay "LCD 16X2-A" at 515.55,2188 h75; Top Overlay "16" at 1983.74,3224.02 h50; Top Overlay "1" at 503.74,3224.02 h50